# Altium PCB SC1.0.pcbdoc (part 1 of 2)
Units mm, origin at the board's own origin, x right, y up, seen from the top; angles counter-clockwise.
Board outline 78.88 x 53.72 mm, 2 copper layers (Top Layer, Bottom Layer); 127 components, 102 nets, 381 pads, 137 vias.
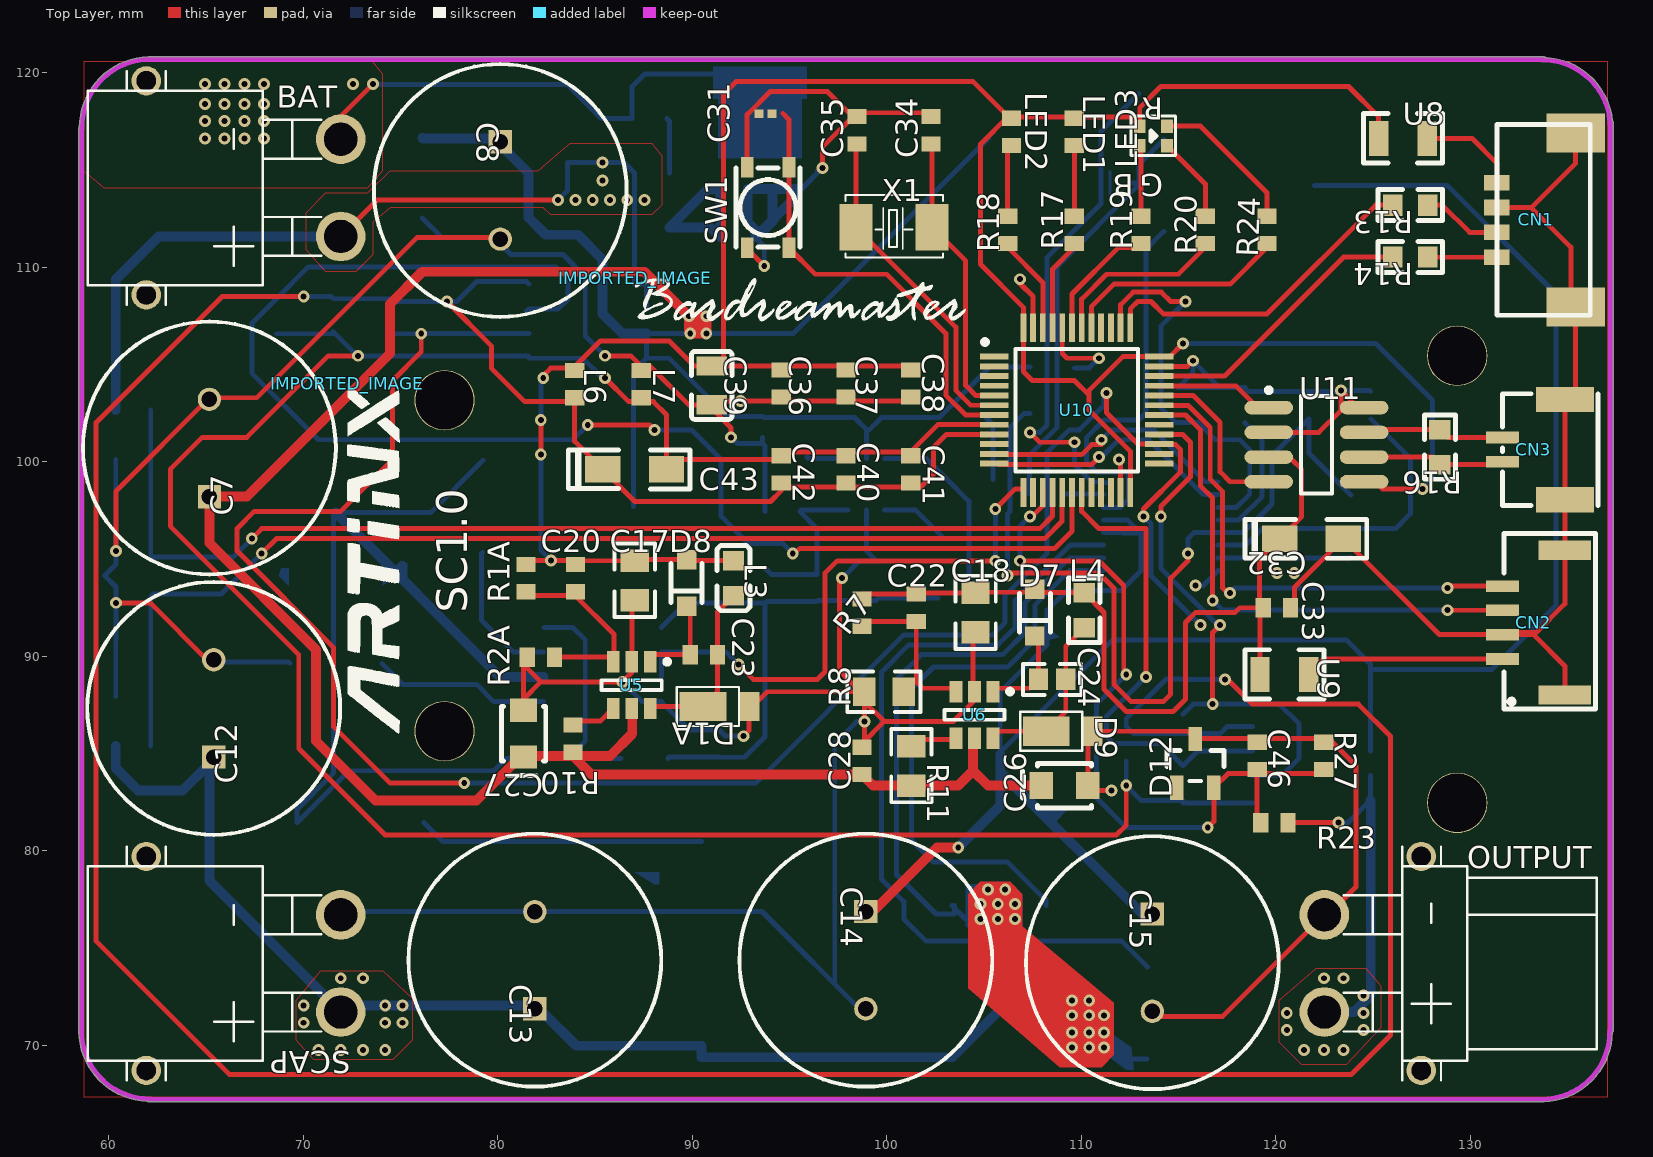
[diagram p0: Top Layer view]
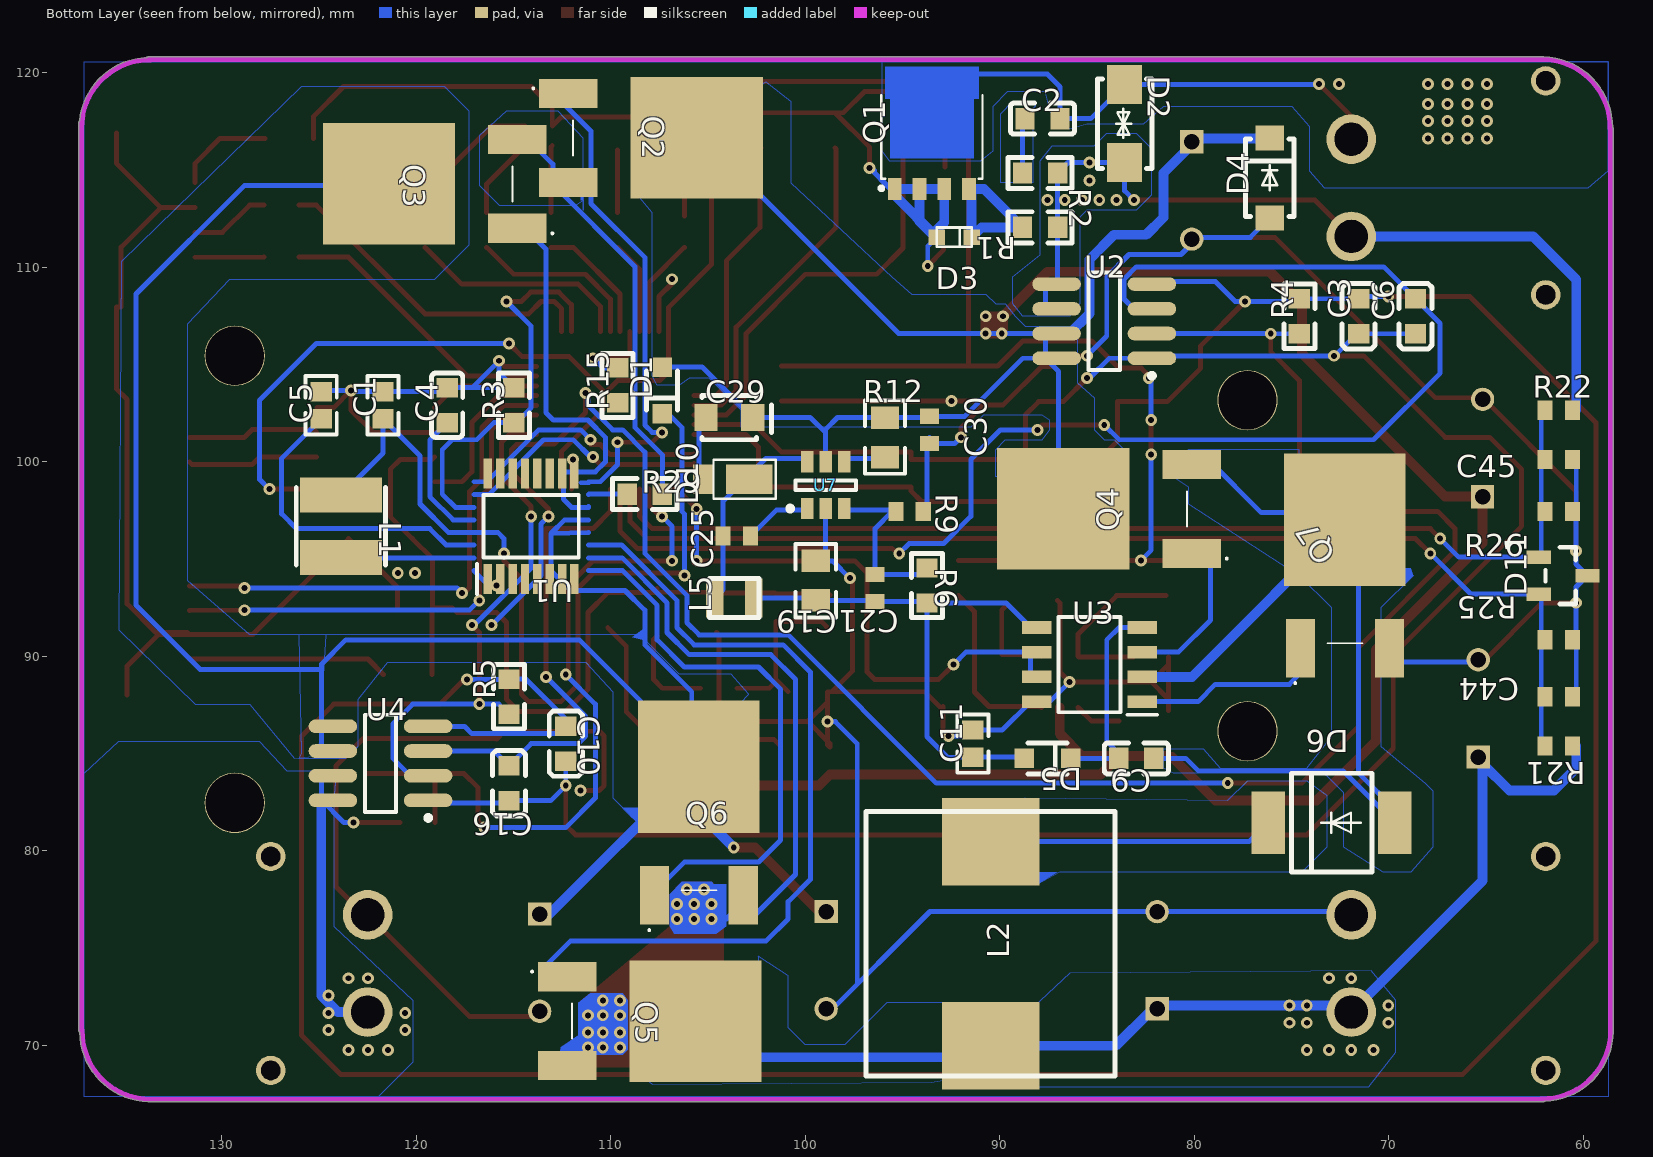
[diagram p1: Bottom Layer view, seen from below]

## Layer stack, top to bottom
Top Solder: solder mask 0.0102, Solder Resist, Dk 3.5
Top Layer: signal copper 0.0356
Dielectric1: dielectric 0.32, FR-4, Dk 4.8
Bottom Layer: signal copper 0.0356
Bottom Solder: solder mask 0.0102, Solder Resist, Dk 3.5

## Board outline
61.989,67.134 cw(c62.101,70.759) 58.474,70.704 cw(c58.601,70.719) 58.473,70.719 58.473,117.135 cw(c58.601,117.135) 58.501,117.214 cw(c62.129,117.198) 62.053,120.824 cw(c62.07,120.698) 62.07,120.826 133.787,120.826 cw(c133.787,120.698) 133.871,120.794 cw(c133.713,117.17) 137.322,117.539 cw(c137.226,117.455) 137.354,117.455 137.354,70.762 cw(c137.226,70.762) 137.313,70.668 cw(c133.686,70.732) 133.795,67.106 cw(c133.772,67.231) 133.772,67.104 62.07,67.104 cw(c62.07,67.231)

## Design rules (kind name [scope] priority, off if disabled: settings)
Clearance [All] p1: gap=0.254 ignorepadtopadclearanceinfootprint=FALSE except(0: Arc-Hole Track-Hole SMDPad-Hole THPad-Hole Via-Hole Fill-Hole Poly-Hole Region-Hole Text-Hole)
PolygonConnect [All] p1: connectstyle=Relief reliefconductorwidth=0.254 reliefentries=4 polygonreliefangle="90 Angle" airgapwidth=0.254
RoutingVias [All] p1: holewidth=0.711 width=1.27 viastyle="Through Hole" minholewidth=0.711 minwidth=1.27 maxholewidth=0.711 maxwidth=1.27
SolderMaskExpansion [All] p1: expansion=0.102
Width [All] p1: maxlimit=0.254 minlimit=0.254 preferedwidth=0.254
30 further rules are at their usual default settings.

## Components (designator, comment, footprint, x,y, rotation, side; value= is the part's Value field where it differs from the comment)
BAT "XT30PW-M" XT30PW 71.936,114.094 r90 top
C1 "1uF" 0603#1 121.72,102.918 r270 bottom
C2 "10nf" C0603 87.811,117.65 r180 bottom
C3 "100nF" L0603#1 71.555,107.49 r270 bottom
C4 "4.7nF" C0603 118.418,102.918 r90 bottom
C5 "1uF" 0603#1 124.895,102.918 r270 bottom
C6 "100nF" L0603#1 68.634,107.49 r270 bottom
C7 "470uF" CAPPRD500W60D1300H2700 65.184,98.219 r90 top
C8 "470uF" CAPPRD500W60D1300H2700 80.137,116.459 r270 top
C9 "0.47uF" C0603 82.985,84.757 r180 bottom
C10 "100nF" L0603#1 112.322,85.519 r270 bottom
C11 "1uF" 0603#1 91.396,85.519 r270 bottom
C12 "470uF" CAPPRD500W60D1300H2700 65.405,84.828 r90 top
C13 "470uF" CAPPRD500W60D1300H2700 81.915,71.882 r90 top
C14 "470uF" CAPPRD500W60D1300H2700 98.933,76.883 r270 top
C15 "470uF" CAPPRD500W60D1300H2700 113.665,76.755 r270 top
C16 "100nF" L0603#1 115.243,83.487 r270 bottom
C17 "10uF" 0805#1 87.049,93.901 r270 top
C18 "10uF" 0805#1 104.575,92.25 r270 top
C19 "10uF" 0805#2 99.465,93.901 r270 bottom
C20 "47pF" CAPC1608X90N 84.001,94.028 r270 top
C21 "47pF" CAPC1608X90N 96.417,93.52 r270 bottom
C22 "47pF" CAPC1608X90N 101.527,92.504 r270 top
C23 "100nF" CAPC1608X90N 90.605,90.091 r0 top
C24 "100nF" 0603#2 108.512,88.821 r0 top
C25 "100nF" CAPC1608X90N 103.529,96.187 r180 bottom
C26 "4.7uF" CAP-CASE-A_3216#1 109.147,83.36 r0 top
C27 "4.7uF" CAP-CASE-A_3216#1 81.334,86.027 r90 top
C28 "100nF" CAPC1608X90N 98.733,84.63 r270 top
C29 "4.7uF" CAP-CASE-A_3216#2 103.91,102.283 r180 bottom
C30 "100nF" CAPC1608X90N 93.623,101.648 r270 bottom
C31 "100nF" CAPC0603X33N 93.78,117.904 r0 top
C32 "47uF" CASE-A_3216 121.847,96.06 r180 top
C33 "100nF" CAPC1608X90N 120.069,92.504 r0 top
C34 "33pF" CAPC1608X90N 102.289,117.054 r270 top
C35 "33pF" CAPC1608X90N 98.479,117.054 r270 top
C36 "100nF" CAPC1608X90N 94.58,104.034 r90 top
C37 "100nF" CAPC1608X90N 97.908,104.034 r270 top
C38 "100nF" CAPC1608X90N 101.237,104.034 r90 top
C39 "4.7uF" C0805 91.011,103.934 r90 top
C40 "1uF" CAPC1608X90N 97.908,99.616 r270 top
C41 "10nF" CAPC1608X90N 101.237,99.616 r270 top
C42 "100nF" CAPC1608X90N 94.58,99.616 r270 top
C43 "47uF" CASE-A_3216 87.049,99.616 r180 top
C44 "100nf" CAPC1608X90N 61.268,87.932 r180 bottom
C45 "100nf" CAPC1608X90N 61.268,100.124 r180 bottom
C46 "100nf" CAPC1608X90N 119.053,84.884 r270 top
CN1 "532610471" SMD-10.15X4.8-4P 133.404,112.443 r90 top
CN2 "X1251WRS-04HF-LPSW" CONN-TH_4PIN-H-MALE-PITCH1.25-L_X1251WRS-04HF-LPSW 133.276,91.742 r90 top
CN3 "A1257WR-S-2P" CONN-SMD_A1257WR-S-2P 133.277,100.632 r90 top
D1 "1N4148WS T4" SOD-323_L1.8-W1.3-LS2.5-FD#1 107.369,103.68 r90 bottom
D1A "DFLS160Q-7" POWERDI-123#1 91.748,87.424 r0 top
D2 "SMAJ26CA-13-F" SMA_L4.4-W2.6-LS5.0-BI 83.59,117.396 r90 bottom
D3 "BZX584C9V1" SOD-523F_L1.7-W0.9-LS1.7-RD 92.353,111.554 r180 bottom
D4 "SMAJ26A" SMA(DO-214AC) 76.127,114.602 r270 bottom
D5 "1N4148WS T4" SOD-323_L1.8-W1.3-LS2.5-FD#1 87.557,84.757 r0 bottom
D6 "S10M" SMC(DO-214AB) 72.952,81.455 r180 bottom
D7 "1N4148WS T4" SOD-323_L1.8-W1.3-LS2.5-FD#2 107.623,92.25 r270 top
D8 "1N4148WS T4" SOD-323_L1.8-W1.3-LS2.5-FD#2 89.716,93.774 r270 top
D9 "DFLS160Q-7" POWERDI-123#1 109.401,86.154 r0 top
D10 "DFLS160Q-7" POWERDI-123#2 104.067,99.108 r180 bottom
D11 "MMBZ5V6ALT1G" SOT-23(SOT-23-3)#1 61.043,94.155 r90 bottom
D12 "MMBZ5V6ALT1G" SOT-23(SOT-23-3)#2 115.878,84.503 r0 top
IMPORTED_IMAGE "Comment" IMPORTED_IMAGE 87.09,109.437 r0 top
IMPORTED_IMAGE "Comment" IMPORTED_IMAGE 72.263,104.027 r0 top
L1 "1mH" IND-SMD_L4.0-W4.0 123.879,96.695 r90 bottom
L2 "1.5uH" SMD-L-13.5X12.8X5.0 90.478,75.232 r270 bottom
L3 "10uH" L0603#2 92.129,94.028 r90 top
L4 "10uH" R0603#1 110.163,92.377 r90 top
L5 "33uH" 1008 103.656,93.012 r0 bottom
L6 "10uH" CAPC1608X90N 83.965,104.004 r270 top
L7 "10uH" CAPC1608X90N 87.393,104.004 r270 top
LED1 "19-217/R6C-AL1M2VY/3T" CAPC1608X90N 109.655,116.967 r270 top
LED2 "19-217/GHC-YR1S2/3T" CAPC1608X90N 106.426,116.967 r270 top
LED3 "2SA0603VGB01JT07" LED-SMD_4PIN-L1.60-W1.60-TL-FD 113.718,116.762 r0 top
OUTPUT "XT30PW-F" XT30_H_F 122.355,74.216 r270 top
Q1 "PSMN1R5-30YLC,115" SOT-669_L4.9-W4.0-P1.27-LS6.0-BR 93.496,115.999 r90 bottom
Q2 "IRFR3410TRPBF" AOD409 108.891,116.66 r270 bottom
Q3 "IRFR3410TRPBF" AOD409 118.112,114.3 r90 bottom
Q4 "IRFR3410TRPBF" AOD409 83.439,97.584 r90 bottom
Q5 "IRFR3410TRPBF" AOD409 108.952,71.247 r270 bottom
Q6 "IRFR3410TRPBF" AOD409 105.479,81.028 r180 bottom
Q7 "IRFR3410TRPBF" AOD409 72.263,93.726 r180 bottom
R1 "100k" R0603#2 87.938,112.062 r0 bottom
R1A "124K" CAPC1608X90N 81.461,94.028 r90 top
R2 "33R" R0603#2 87.938,114.856 r0 bottom
R2A "40.2K" CAPC1608X90N 82.223,89.964 r0 top
R3 "10K" R0603#2 114.989,102.918 r90 bottom
R4 "10K" R0603#2 74.603,107.49 r270 bottom
R5 "10K" R0603#2 115.243,87.932 r270 bottom
R6 "113K" R0603#2 93.75,93.647 r90 bottom
R7 "124K" CAPC1608X90N 98.733,92.25 r90 top
R8 "23.7K" 0805#1 99.876,88.186 r0 top
R9 "8.2K" CAPC1608X90N 94.639,97.457 r180 bottom
R10 "100K" CAPC1608X90N 83.874,85.773 r270 top
R11 "500K" 0805#1 101.273,84.376 r270 top
R12 "500K" 0805#2 95.909,101.267 r90 bottom
R13 "120" R0603#1 126.927,113.205 r180 top
R14 "120" R0603#1 126.927,110.538 r180 top
R15 "10K" R0603#2 109.655,103.934 r270 bottom
R16 "120" R0603#1 128.451,100.759 r270 top
R17 "1K" CAPC1608X90N 109.655,111.935 r90 top
R18 "1K" CAPC1608X90N 106.226,111.935 r90 top
R19 "1K" CAPC1608X90N 113.084,111.935 r90 top
R20 "1K" CAPC1608X90N 116.386,111.935 r90 top
R21 "100K" CAPC1608X90N 61.268,85.392 r180 bottom
R22 "100K" CAPC1608X90N 61.268,102.664 r180 bottom
R23 "100K" CAPC1608X90N 119.942,81.455 r180 top
R24 "1K" CAPC1608X90N 119.561,111.935 r90 top
R25 "10K" CAPC1608X90N 61.268,90.853 r180 bottom
R26 "10K" CAPC1608X90N 61.268,97.457 r180 bottom
R27 "10K" CAPC1608X90N 122.482,84.884 r270 top
R29 "R0603" R0603#2 108.258,98.346 r0 bottom
SCAP "XT30PW-M" XT30PW 71.936,74.216 r90 top
SW1 "SKRPABE010" KEY-SMD-4P_L4.2-W3.2-H2.5 93.906,113.078 r90 top
U1 "LTC1473CGN#PBF" SOP64P601X173-16N 114.1,96.695 r90 bottom
U2 "ACS711ELCTR-25AB-T" SO8_M 84.636,107.236 r0 bottom
U3 "IRS2103STRPBF" SOIC127P600X175-8N 85.398,89.583 r0 bottom
U4 "ACS711ELCTR-25AB-T" SO8_M 121.847,84.503 r0 bottom
U5 "MP2456GJ-Z" SOT23-6_N 86.893,88.524 r270 top
U6 "MP2456GJ-Z" SOT23-6_N 104.521,86.995 r270 top
U7 "MP2456GJ-Z" SOT23-6_N 98.959,98.806 r90 bottom
U8 "MF-NSMF050-2" FUSE-1206 126.546,116.634 r0 top
U9 "MF-NSMF050-2" FUSE-1206 120.45,89.075 r0 top
U10 "STM32F103C8T6" QFP50P900X900X160-48N 109.782,102.664 r0 top
U11 "TJA1051T/3/1J" SO8_M 122.101,100.886 r0 top
X1 "8MHz" SMD-5032_2P 100.384,112.062 r180 top

## Footprints (in the part's own frame and the unit in brackets; to place one, negate y for a bottom-side part, rotate by r counter-clockwise, add the part's x,y. Pads: shape width x height; smd on the part's side, far side on the other; paste and mask are expansions set on the pad)
0603#1 [mm]
  rect 1x1.1 smd: 1(0.7,0) 2(-0.7,0)
  silkscreen extent -1.5,-0.8 1.5,0.8
0603#2 [mm]
  rect 1x1.1 smd: 1(-0.7,0) 2(0.7,0)
  silkscreen extent -1.5,-0.8 1.5,0.8
0805#1 [mm]
  rect 1.16x1.45 smd: 1(-1.016,0) 2(1.016,0)
  silkscreen extent -1.9,-1.03 1.87,1.04
0805#2 [mm]
  rect 1.16x1.45 smd: 1(1.016,0) 2(-1.016,0)
  silkscreen extent -1.87,-1.04 1.9,1.03
1008 [mm]
  rect 0.9x2 smd: 1(1,0) 2(-1,0)
  silkscreen extent -1.27,-1 1.27,1.02
AOD409 [mm]
  rect 1.5x3 smd: 1(-2.286,-3.3) 3(2.286,-3.3)
  rect 6.25x6.8 smd: 4(0,3.3)
  silkscreen extent -2.6,-5.15 0.9,-3.05, body extent -3.3,-4.65 3.3,6.07, height 2.5
C0603 [mm]
  rect 1x1.1 smd: 1(0.9,0) 2(-0.9,0)
  silkscreen extent -1.65,-0.8 1.65,0.8
C0805 [mm]
  rect 1x1.55 smd: 1(-1,0) 2(1,0)
  silkscreen extent -1.75,-1.04 1.75,1.04
CAP-CASE-A_3216#1 [mm]
  rect 1.2x1.4 smd: 1(-1.2,0) 2(1.2,0)
  silkscreen extent -2.16,-1.14 1.4,1.14
CAP-CASE-A_3216#2 [mm]
  rect 1.2x1.4 smd: 1(1.2,0) 2(-1.2,0)
  silkscreen extent -1.4,-1.14 2.16,1.14
CAPC0603X33N [mm]
  rect 0.47x0.44 smd: 1(-0.335,0) 2(0.335,0)
  body extent -0.3,-0.15 0.3,0.15, height 0.33
CAPC1608X90N [mm]
  rect 0.78x0.99 smd: 1(-0.7,0) 2(0.7,0)
  body extent -0.8,-0.41 0.8,0.41, height 0.9
CAPPRD500W60D1300H2700 [mm]
  rect 1.2x1.2 hole 0.8: 1(0,0)
  round 1.2 hole 0.8: 2(5,0)
  silkscreen extent -4,-6.5 9,6.5, body extent -3.96,-6.5 9.04,6.5, height 20
CASE-A_3216 [mil]
  rect 71.5x53.5 smd: 1(64.5,0) 2(-64.5,0)
  silkscreen extent -112,-39 134,40
CONN-SMD_A1257WR-S-2P [mm]
  rect 0.599x1.702 smd: 1(0.625,1.6) 2(-0.625,1.6)
  rect 1.3x3 smd: 3(2.575,-1.6) 4(-2.575,-1.6)
  silkscreen extent -2.88,-3.3 2.87,1.6
CONN-TH_4PIN-H-MALE-PITCH1.25-L_X1251WRS-04HF-LPSW [mm]
  rect 0.6x1.7 smd: 1(-1.875,1.6) 2(-0.625,1.6) 3(0.625,1.6) 4(1.875,1.6)
  rect 1x2.7 smd: 5(3.725,-1.6) 6(-3.725,-1.6)
  silkscreen extent -4.44,-3.18 4.57,1.52
FUSE-1206 [mm]
  rect 1x1.801 smd: 1(-1.25,0) 2(1.25,0)
  silkscreen extent -2.03,-1.27 2.03,1.27
IMPORTED_IMAGE [mm]
  silkscreen extent -0.02,-2.2 16.98,0
IND-SMD_L4.0-W4.0 [mm]
  rect 1.8x4.2 smd: 1(1.6,0) 2(-1.6,0)
  silkscreen extent -2,-2.3 2,2.3
KEY-SMD-4P_L4.2-W3.2-H2.5 [mm]
  rect 1.05x0.65 smd: 1(-2.075,1.075) 2(2.075,1.075) 3(-2.075,-1.075) 4(2.075,-1.075)
  silkscreen extent -2.03,-1.65 2.03,1.65
L0603#1 [mm]
  rect 1x1.1 smd: 1(0.9,0) 2(-0.9,0)
  silkscreen extent -1.68,-0.85 1.68,0.85
L0603#2 [mm]
  rect 1x1.1 smd: 1(-0.9,0) 2(0.9,0)
  silkscreen extent -1.68,-0.85 1.68,0.85
LED-SMD_4PIN-L1.60-W1.60-TL-FD [mm]
  rect 0.6x0.7 smd: 1(-0.7,0.5) 2(0.7,0.5) 3(-0.7,-0.5) 4(0.7,-0.5)
  silkscreen extent -1.14,-1.02 1.14,1.02
POWERDI-123#1 [mil]
  rect 94.4x59 smd: 1(-46.75,0)
  rect 41.4x59 smd: 2(46.75,0)
  silkscreen extent -100,-39 26,39
POWERDI-123#2 [mil]
  rect 94.4x59 smd: 1(46.75,0)
  rect 41.4x59 smd: 2(-46.75,0)
  silkscreen extent -26,-39 100,39
QFP50P900X900X160-48N [mm]
  rect 1.475x0.3 smd: 1(-4.238,2.75) 2(-4.238,2.25) 3(-4.238,1.75) 4(-4.238,1.25) 5(-4.238,0.75) 6(-4.238,0.25) 7(-4.238,-0.25) 8(-4.238,-0.75) 9(-4.238,-1.25) 10(-4.238,-1.75) 11(-4.238,-2.25) 12(-4.238,-2.75) 25(4.238,-2.75) 26(4.238,-2.25) 27(4.238,-1.75) 28(4.238,-1.25) 29(4.238,-0.75) 30(4.238,-0.25) 31(4.238,0.25) 32(4.238,0.75) 33(4.238,1.25) 34(4.238,1.75) 35(4.238,2.25) 36(4.238,2.75)
  rect 0.3x1.475 smd: 13(-2.75,-4.238) 14(-2.25,-4.238) 15(-1.75,-4.238) 16(-1.25,-4.238) 17(-0.75,-4.238) 18(-0.25,-4.238) 19(0.25,-4.238) 20(0.75,-4.238) 21(1.25,-4.238) 22(1.75,-4.238) 23(2.25,-4.238) 24(2.75,-4.238) 37(2.75,4.238) 38(2.25,4.238) 39(1.75,4.238) 40(1.25,4.238) 41(0.75,4.238) 42(0.25,4.238) 43(-0.25,4.238) 44(-0.75,4.238) 45(-1.25,4.238) 46(-1.75,4.238) 47(-2.25,4.238) 48(-2.75,4.238)
  silkscreen extent -4.85,-3.15 3.15,3.62, body extent -4.5,-4.5 4.5,4.5, height 1.6
R0603#1 [mm]
  rect 1x1.1 smd: 1(-0.9,0) 2(0.9,0)
  silkscreen extent -1.65,-0.8 1.65,0.8
R0603#2 [mm]
  rect 1x1.1 smd: 1(0.9,0) 2(-0.9,0)
  silkscreen extent -1.65,-0.8 1.65,0.8
SMA(DO-214AC) [mil]
  rect 50x57.9 smd: 1(81,0) 2(-81,0)
  silkscreen extent -79,-49 78,49
SMA_L4.4-W2.6-LS5.0-BI [mm]
  rect 2x1.8 smd: 1(2,0) 2(-2,0)
  silkscreen extent -2.3,-1.4 2.3,1.4
SMC(DO-214AB) [mil]
  rect 67.87x126 smd: 1(128.41,0) 2(-128.4,0)
  silkscreen extent -81,-100 82,100
SMD-10.15X4.8-4P [mm]
  rect 2x3 smd: 0(-4.479,-2.025) 0(4.479,-2.025)
  rect 0.8x1.3 smd: 1(1.92,2.025) 2(0.64,2.025) 3(-0.64,2.025) 4(-1.92,2.025)
  silkscreen extent -4.9,-2.78 4.9,2.03
SMD-5032_2P [mm]
  rect 1.7x2.4 smd: 1(-1.96,0.001) 2(1.96,-0.001)
  silkscreen extent -2.51,-1.67 2.49,1.55
SMD-L-13.5X12.8X5.0 [mm]
  rect 4.5x5 smd: 1(5.25,0) 2(-5.25,0)
  silkscreen extent -6.8,-6.4 6.8,6.4
SO8_M [mm] "SOIC, 8-Leads, Body 4.9x3.9mm, Pitch 1.27mm, IPC Low Density"
  oval 2.5x0.7 smd: 1(-2.45,1.905) 2(-2.45,0.635) 3(-2.45,-0.635) 4(-2.45,-1.905) 5(2.45,-1.905) 6(2.45,-0.635) 7(2.45,0.635) 8(2.45,1.905)
  silkscreen extent -2.57,-2.5 0.8,2.93, body extent -2,-2.5 2,2.5, height 1.75
SOD-323_L1.8-W1.3-LS2.5-FD#1 [mm]
  rect 1x1 smd: 1(1.2,0) 2(-1.2,0)
  silkscreen extent -1,-0.8 1,0.8
SOD-323_L1.8-W1.3-LS2.5-FD#2 [mm]
  rect 1x1 smd: 1(-1.2,0) 2(1.2,0)
  silkscreen extent -1,-0.8 1,0.8
SOD-523F_L1.7-W0.9-LS1.7-RD [mm]
  rect 0.85x0.8 smd: 1(0.9,0) 2(-0.9,0)
  silkscreen extent -0.9,-0.5 0.9,0.5
SOIC127P600X175-8N [mm]
  rect 1.525x0.65 smd: 1(-2.712,1.905) 2(-2.712,0.635) 3(-2.712,-0.635) 4(-2.712,-1.905) 5(2.712,-1.905) 6(2.712,-0.635) 7(2.712,0.635) 8(2.712,1.905)
  silkscreen extent -3.47,-2.45 1.6,2.58, body extent -3,-2.45 3,2.45, height 1.75
SOP64P601X173-16N [mm]
  rect 1.526x0.435 smd: 1(-2.712,2.222) 2(-2.712,1.588) 3(-2.712,0.952) 4(-2.712,0.318) 5(-2.712,-0.318) 6(-2.712,-0.952) 7(-2.712,-1.588) 8(-2.712,-2.222) 9(2.712,-2.222) 10(2.712,-1.588) 11(2.712,-0.952) 12(2.712,-0.318) 13(2.712,0.318) 14(2.712,0.952) 15(2.712,1.588) 16(2.712,2.222)
  silkscreen extent -3.47,-2.44 1.6,2.79, body extent -3,-2.44 3,2.44, height 1.73
SOT23-6_N [mm] "SOT23, 6-Leads, Body 2.9x1.6mm, Pitch 0.95mm, Lead Span 2.7mm, IPC Medium Density"
  rect 1.1x0.65 smd: 1(-1.2,0.95) 2(-1.2,0) 3(-1.2,-0.95) 4(1.2,-0.95) 5(1.2,0) 6(1.2,0.95)
  silkscreen extent -1.32,-1.55 0.25,1.95, body extent -0.9,-1.55 0.9,1.55, height 1.45
SOT-23(SOT-23-3)#1 [mm]
  rect 0.7x1.25 smd: 1(0.95,1.25) 2(-0.95,1.25) 3(0,-1.25)
  silkscreen extent -1.46,-0.65 1.46,0.9
SOT-23(SOT-23-3)#2 [mm]
  rect 0.7x1.25 smd: 1(-0.95,-1.25) 2(0.95,-1.25) 3(0,1.25)
  silkscreen extent -1.46,-0.9 1.46,0.65
SOT-669_L4.9-W4.0-P1.27-LS6.0-BR [mm]
  rect 1.148x0.701 smd: 1(-1.963,1.905) 2(-1.967,0.635) 3(-1.967,-0.635) 4(-1.963,-1.905)
  round 0 smd: 5(1.967,0)
  Top Layer region: 4.317,-2.4 4.317,2.4 2.667,2.4 2.667,2.15 -0.383,2.15 -0.383,-2.15 2.667,-2.15 2.667,-2.4
  silkscreen extent -2,-2.6 2.87,2.67
XT30_H_F [mm]
  round 2.55 hole 1.7 slot 1.7 at 0 deg: +(2.5,0.15) -(-2.5,0.15)
  round 1.508 hole 1: P$3(5.5,5.135) P$4(-5.5,5.135)
  silkscreen extent -6,1.15 6,14.15
XT30PW [mm]
  round 2.55 hole 1.7 slot 1.7 at 0 deg: +(-2.5,0) -(2.5,0)
  round 1.508 hole 1: P$3(5.5,10) P$4(-5.5,10)
  silkscreen extent -6,1 6,13

## Free pads (board coordinates)
  round 3.105 hole 3: 1(77.27,86.154) 1(77.27,103.172) 1(129.34,82.471) 1(129.34,105.458)

## Via types
v1: diameter 0.61, hole 0.305, Top Layer to Bottom Layer, 137 vias

## Nets (pads, with @x,y where several pads share a name; then routed paths per layer and width w, separated by ;. In a path a pad name is that pad's centre, name@x,y a point inside that pad or via, vN(x,y) a via of type N, cw(c..) or ccw(c..) an arc to the next point about the centre after c; other vN are vias at no path point)
AGND: C3.1 C6.1 C10.1 C16.1 C40.1 C41.1 C42.1 C43.2 L7.2 U2.5 U4.5 U10.8 | length 126.7
  Top Layer w0.254: v1(72.825,105.458) 71.301,105.458 67.11,101.267 64.824,101.267 63.173,99.616 63.173,96.695 69.777,90.091 69.777,85.265 74.222,80.82 111.814,80.82 112.322,81.328 v1(112.322,83.36) ; v1(85.525,104.315) 86.736,103.104 L7.2@87.393,103.104 ; L7.2@87.392,103.104 88.006,103.104 88.687,102.423 C43.2@88.687,99.616 89.195,100.124 94.58,100.124 C42.1@94.58,100.515 ; C42.1@94.58,100.516 97.908,100.516 101.237,100.516 102.635,101.914 U10.8@105.732,101.914
  Bottom Layer w0.254: C6.1@68.634,106.59 C3.1@71.555,106.59 ; C3.1@71.529,106.717 72.788,105.458 81.588,105.458 ; 81.613,105.331 84.382,105.331 85.398,104.315 v1(85.525,104.315) ; C10.1@112.322,84.619 v1(112.322,83.36) 113.095,82.587 C16.1@115.243,82.587 ; C16.1@115.23,82.466 118.811,82.476
AVCC-3.3: C3.2 C10.2 C40.2 C41.2 C42.2 C43.1 L6.2 R4.2 R5.2 U2.8 U4.8 U10.9 | length 197.5
  Top Layer w0.254: v1(70.031,108.506) 65.84,108.506 59.363,102.029 59.363,75.359 66.221,68.501 123.879,68.501 125.911,70.533 125.911,85.9 124.26,87.551 118.799,87.551 117.529,88.821 v1(117.402,88.821) ; v1(77.397,108.252) 79.683,105.966 79.683,104.823 81.402,103.104 83.965,103.104 83.965,101.062 C43.1@85.41,99.616 87.061,97.965 94.034,97.965 94.58,98.512 94.58,98.716 97.908,98.716 101.237,98.716 101.769,98.716 102.416,99.362 102.416,100.759 103.071,101.414 U10.9@105.732,101.414
  Bottom Layer w0.254: v1(70.031,108.506) 71.439,108.506 C3.2@71.555,108.39 ; C3.2@71.555,108.39 R4.2@74.603,108.39 ; R4.2@74.603,108.39 74.741,108.252 v1(77.397,108.252) 77.917,108.257 78.913,109.268 81.486,109.268 81.613,109.141 ; R5.2@115.243,88.832 114.364,88.831 112.322,86.789 C10.2@112.322,86.419 112.713,86.027 117.148,86.027 117.529,86.408 118.824,86.408 ; R5.2@115.243,88.832 115.254,88.821 v1(117.402,88.821)
BOOT0: R15.2 U10.44 | length 4.6
  Top Layer w0.254: U10.44@109.032,106.716 109.032,105.573 109.274,105.331 v1(110.925,105.331)
  Bottom Layer w0.254: R15.2@109.655,104.834 110.428,104.834 v1(110.925,105.331)
BRIDGE3: C9.1 D6.1 Q4.3 Q7.4 U3.6 | length 54
  Bottom Layer w0.254: Q4.3@79.241,100.074 76.564,97.396 71.682,97.396 71.555,97.396 71.555,83.995 69.69,82.131 D6.1@69.69,81.455 72.357,84.122 79.81,84.122 80.445,84.757 C9.1@82.085,84.757
  Bottom Layer w0.508: Q7.4@71.682,97.396 80.13,88.948 82.375,88.948 ; Q7.4@74.81,94.268 74.81,94.363 Q7.4@75.111,94.663
C2_2: C2.2 R2.1 | length 2.8
  Bottom Layer w0.254: C2.2@88.711,117.65 88.838,117.523 R2.1@88.838,114.856
C4_2: C4.2 U1.4 | length 6.9
  Bottom Layer w0.254: 117.046,97.026 118.113,97.026 119.307,98.219 119.307,101.129 C4.2@118.418,102.018
C21_2: C21.2 R6.1 R9.2 U7.3 | length 8.9
  Bottom Layer w0.254: R6.1@93.75,94.547 94.077,94.22 96.417,94.22 96.417,96.58 95.539,97.457 95.616,97.534 U7.3@98.018,97.534
C23_1: C23.1 D8.2 U5.1 | length 4.6
  Top Layer w0.254: U5.1@87.86,90.015 87.936,90.091 C23.1@89.905,90.091 89.905,92.385 D8.2@89.716,92.574
C24_1: C24.1 D7.2 U6.1 | length 4.9
  Top Layer w0.254: U6.1@105.386,88.364 107.354,88.364 C24.1@107.812,88.821 107.812,90.861 D7.2@107.623,91.05
C25_1: C25.1 U7.1
C25_2: C25.2 D10.1 L5.1 U7.6 | length 13.9
  Bottom Layer w0.254: 99.896,97.534 101.483,97.534 C25.2@102.829,96.187 ; U7.6@99.897,100.175 102.037,100.175 103.104,99.108 104.229,97.983 104.229,96.187 104.229,93.439 L5.1@104.656,93.012
CAN_N: CN3.2 R16.2 U11.6 | length 6.8
  Top Layer w0.254: U11.6@125.123,100.251 128.059,100.251 R16.2@128.451,99.859 131.528,99.859 CN3.2@131.677,100.007
CAN_P: CN3.1 R16.1 U11.7 | length 6.8
  Top Layer w0.254: U11.7@125.123,101.521 125.261,101.659 R16.1@128.451,101.659 128.853,101.257 CN3.1@131.677,101.257
CAN_R: U10.32 U11.4 | length 8.6
  Top Layer w0.254: U10.32@113.83,103.414 115.763,103.414 117.148,102.029 117.148,99.489 117.656,98.981 U11.4@119.078,98.981
CAN_T: U10.33 U11.1 | length 5.7
  Top Layer w0.254: U10.33@113.832,103.914 117.955,103.914 U11.1@119.078,102.791
CN1_1: CN1.1 U8.2 | length 5.1
  Top Layer w0.254: U8.2@127.796,116.634 130.102,116.634 131.379,115.357 CN1.1@131.379,114.363
CN1_3: CN1.3 R13.1 | length 4.1
  Top Layer w0.254: R13.1@127.827,113.205 128.578,113.205 129.975,111.808 CN1.3@131.379,111.803
CN1_4: CN1.4 R14.1 | length 3.6
  Top Layer w0.254: R14.1@127.827,110.538 CN1.4@131.379,110.523
D5_2: C9.2 D5.2 U3.8 | length 11.2
  Bottom Layer w0.254: 82.375,91.488 83.874,91.488 84.509,90.853 84.509,85.646 83.884,85.021 C9.2@83.885,84.757 ; C9.2@83.885,84.757 D5.2@86.357,84.757
DIODE: R3.2 U1.3 U10.38 | length 20.8
  Top Layer w0.254: U10.38@112.032,106.714 112.032,108.089 112.676,108.733 114.127,108.733 114.608,108.252 v1(115.37,108.252)
  Bottom Layer w0.254: v1(115.37,108.252) 114.1,106.982 114.1,102.791 114.873,102.018 R3.2@114.989,102.018 116.016,102.018 116.894,101.14 118.164,101.14 118.672,100.632 118.672,98.346 117.986,97.661 117.046,97.661
F_CHASSIS: R5.1 U4.6 U10.28 | length 28.7
  Top Layer w0.254: U10.28@113.83,101.415 115.222,101.415 115.624,101.013 115.624,99.235 114.1,97.711 v1(114.1,97.203) ; v1(116.767,87.551) 116.767,91.234 v1(117.148,91.615)
  Bottom Layer w0.254: v1(114.1,97.203) 114.1,94.536 117.021,91.615 v1(117.148,91.615) ; R5.1@115.243,87.032 115.761,87.551 120.196,87.551 121.212,86.535 121.212,84.757 120.323,83.868 118.824,83.868
F_IN: R4.1 U2.6 U10.27 | length 106
  Top Layer w0.254: v1(76.077,106.593) 76.076,105.662 74.603,104.188 74.603,100.124 71.936,97.457 67.491,97.457 66.602,96.568 66.602,95.425 71.555,90.472 71.555,86.408 74.476,83.487 v1(78.286,83.487) ; v1(111.306,103.553) 111.306,102.537 112.929,100.914 U10.27@113.83,100.914 ; v1(113.211,97.203) 113.211,97.584 115.116,99.489 115.116,100.632 114.862,100.886 U10.27@113.861,100.886 ; U10.27@113.83,100.914 U10.27@113.861,100.886 ; U10.27@113.83,100.914 U10.27@113.861,100.886
  Bottom Layer w0.254: R4.1@74.603,106.59 v1(76.077,106.593) 81.613,106.601 ; v1(78.286,83.487) 93.272,83.487 100.892,91.107 105.464,91.107 106.099,91.742 106.099,93.139 108.258,95.298 108.258,100.505 109.401,101.648 109.909,101.648 111.179,102.918 111.179,103.553 v1(111.306,103.553) ; v1(113.211,97.203) 113.592,96.822 113.592,94.155 v1(116.132,91.615)
FIX: pad.1
GA1: Q2.1 U1.16 | length 26
  Top Layer w0.254: v1(107.369,101.521) 107.877,101.013 v1(109.655,101.013)
  Bottom Layer w0.254: v1(107.369,101.521) 107.877,101.521 108.258,101.902 108.258,110.518 111.021,113.282 111.021,117.005 Q2.1@112.962,118.946 ; v1(109.655,101.013) 109.655,99.87 110.544,98.981 111.153,98.981 ; 111.123,98.931 111.529,98.931
GA2: Q5.1 U1.11 | length 41.6
  Bottom Layer w0.254: 111.153,95.73 109.451,95.73 106.607,92.885 106.607,91.488 105.718,90.599 101.146,90.599 99.749,89.202 99.749,78.534 100.892,77.391 100.892,76.502 102.035,75.359 112.083,75.359 Q5.1@113.404,74.039
GB1: Q3.1 U1.14 | length 19.8
  Bottom Layer w0.254: 111.153,97.711 111.153,97.661 112.017,97.661 112.449,98.092 112.449,99.362 112.322,99.489 110.798,99.489 110.29,99.997 110.29,101.267 111.179,102.156 112.957,102.156 113.338,102.537 113.338,110.939 Q3.1@114.258,111.859
GB2: Q6.1 U1.9 | length 29.7
  Bottom Layer w0.254: Q6.1@108.207,77.198 108.207,77.442 106.226,79.423 102.416,79.423 101.273,80.566 101.273,88.313 102.416,89.456 106.226,89.456 107.623,90.853 107.623,92.631 109.401,94.409 111.153,94.409